# EAGLE board smartpixel (EAGLE 7.3.0)
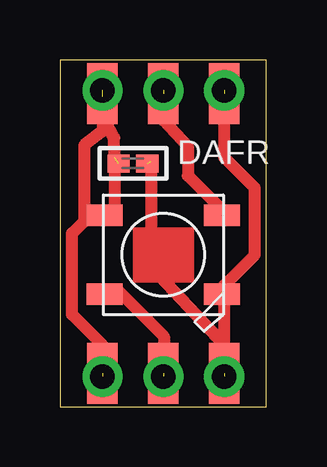
[diagram p0: board, top side]
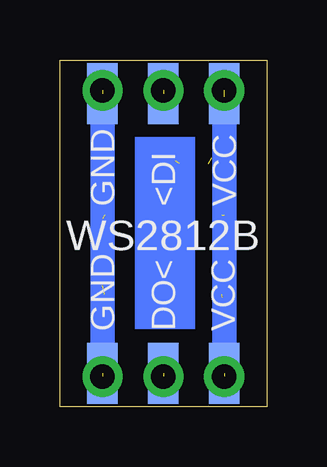
[diagram p1: board, bottom side, seen from below]

Size 8.62 x 14.48 mm. Coordinates in mm from the lower left corner, seen from the top.
Outline: 0,0 8.62,0 8.62,14.48 0,14.48 0,0
Copper layers (1*16): Top 0.0356mm / dielectric 1.5011mm / Bottom 0.0356mm
Design rules "LaenPCBOrder": minimum track width 6mil, minimum drill 13mil, track to track 6mil, track to pad 6mil, pad to pad 6mil, via to via 6mil, smd to smd 6mil, copper to edge 15mil, drill to drill 6mil, minimum pad ring 7mil, minimum via ring 7mil, stop-mask expansion 3mil, vias tented up to drill 0mil, thermal gap 10mil

## Footprints (pad centres in the part's own frame; a part is rotated, then mirrored left to right if it is on the bottom)
C0402K = smd 0.925 x 0.74: 1 -0.6,0; 2 0.6,0
1X03-CLEANBIG = drill 1.016 pad 1.676: 1 -2.54,0; 2 0,0; 3 2.54,0
WS2812B = smd 1.5 x 0.9: 1-VDD 2.45,-1.65; 2-DOUT 2.45,1.65; 3-GND -2.45,1.65; 4-DIN -2.45,-1.65
SMD1,27-2,54 = smd 1.27 x 2.54: 1 0,0

## Placement (x,y rotation side)
C1  [C0402K]  3.05,10.16 0 top
JP3  [1X03-CLEANBIG]  4.32,1.27 0 top
JP4  [1X03-CLEANBIG]  4.32,13.21 0 top
L1  WS2812B  [WS2812B]  4.32,6.35 180 top
PAD1  WIREPADSMD1,27-254  [SMD1,27-2,54]  6.86,1.4 0 top
PAD2  [SMD1,27-2,54]  4.32,1.4 0 top
PAD3  [SMD1,27-2,54]  1.78,13.08 0 top
PAD4  [SMD1,27-2,54]  1.78,1.4 0 top
PAD5  [SMD1,27-2,54]  4.32,13.08 0 bottom
PAD6  [SMD1,27-2,54]  6.86,13.08 0 bottom
PAD7  [SMD1,27-2,54]  1.78,1.4 0 bottom
PAD8  [SMD1,27-2,54]  4.32,1.4 0 bottom
PAD9  WIREPADSMD1,27-254  [SMD1,27-2,54]  6.86,1.4 0 bottom
PAD10  [SMD1,27-2,54]  1.78,13.08 0 bottom
PAD11  [SMD1,27-2,54]  4.32,13.08 0 top
PAD12  [SMD1,27-2,54]  6.86,13.08 0 top

## Library data of the parts
C1 JP3 JP4 L1 = adafruit
PAD1-PAD12 = wirepad

## Nets
N$1: C1.1 JP3.1 JP4.1 L1.1-VDD PAD3.1 PAD4.1
N$4: JP4.2 L1.4-DIN PAD5.1
N$6: JP3.2 L1.2-DOUT PAD2.1
N$8: C1.2 JP3.3 JP4.3 L1.3-GND PAD1.1 PAD6.1

## Tracks (layer width: path | path; a pad name or v marks a point on that pad's centre or on a via)
N$1  (5 unrouted)
  Top 0.508: JP3.1 1.78,2.59 0.51,3.86 0.51,7.24 1.02,7.75 | 1.78,12.95 1.78,12.12 | 1.78,12.12 1.78,11.51 1.02,10.92 1.02,7.75 | 1.02,7.75 1.78,8 | 2.29,10.41 2.26,11.23 1.78,12.12
  Bottom 1.016: 1.78,12.7 JP3.1
N$4  (2 unrouted)
  Top 0.508: JP4.2 4.32,11.96 5.33,10.87 5.33,9.65 6.73,8.26 6.86,7.87
N$6  (2 unrouted)
  Top 0.508: 1.85,4.57 2.41,4.88 4.34,2.95 JP3.2
N$7
  Top 0.508: 2.54,10.16 2.29,9.91 2.29,7.87
N$8  (4 unrouted)
  Top 0.508: 3.81,10.26 3.81,5.44 3.56,5.84 3.56,6.12 6.86,2.56 | JP3.3 6.86,2.56 | 6.86,2.56 6.86,5.08 8.13,6.35 8.13,9.14 6.86,10.41 JP4.3
  Bottom 1.016: JP3.3 6.86,12.7
(copper drawn outside any net)
  shapes: Bottom area x1, Top area x1

## Text on the board
tPlace: DAFR
bPlace: VCC | <DI | GND | WS2812B | VCC | DO< | GND